# Altium PCB PCB1.PcbDoc (part 1 of 2)
Units mil, origin at the board's own origin, x right, y up, seen from the top; angles counter-clockwise.
Board outline 2930 x 2020 mil, 2 copper layers (Top Layer, Bottom Layer); 49 components, 42 nets, 248 pads, 108 vias.
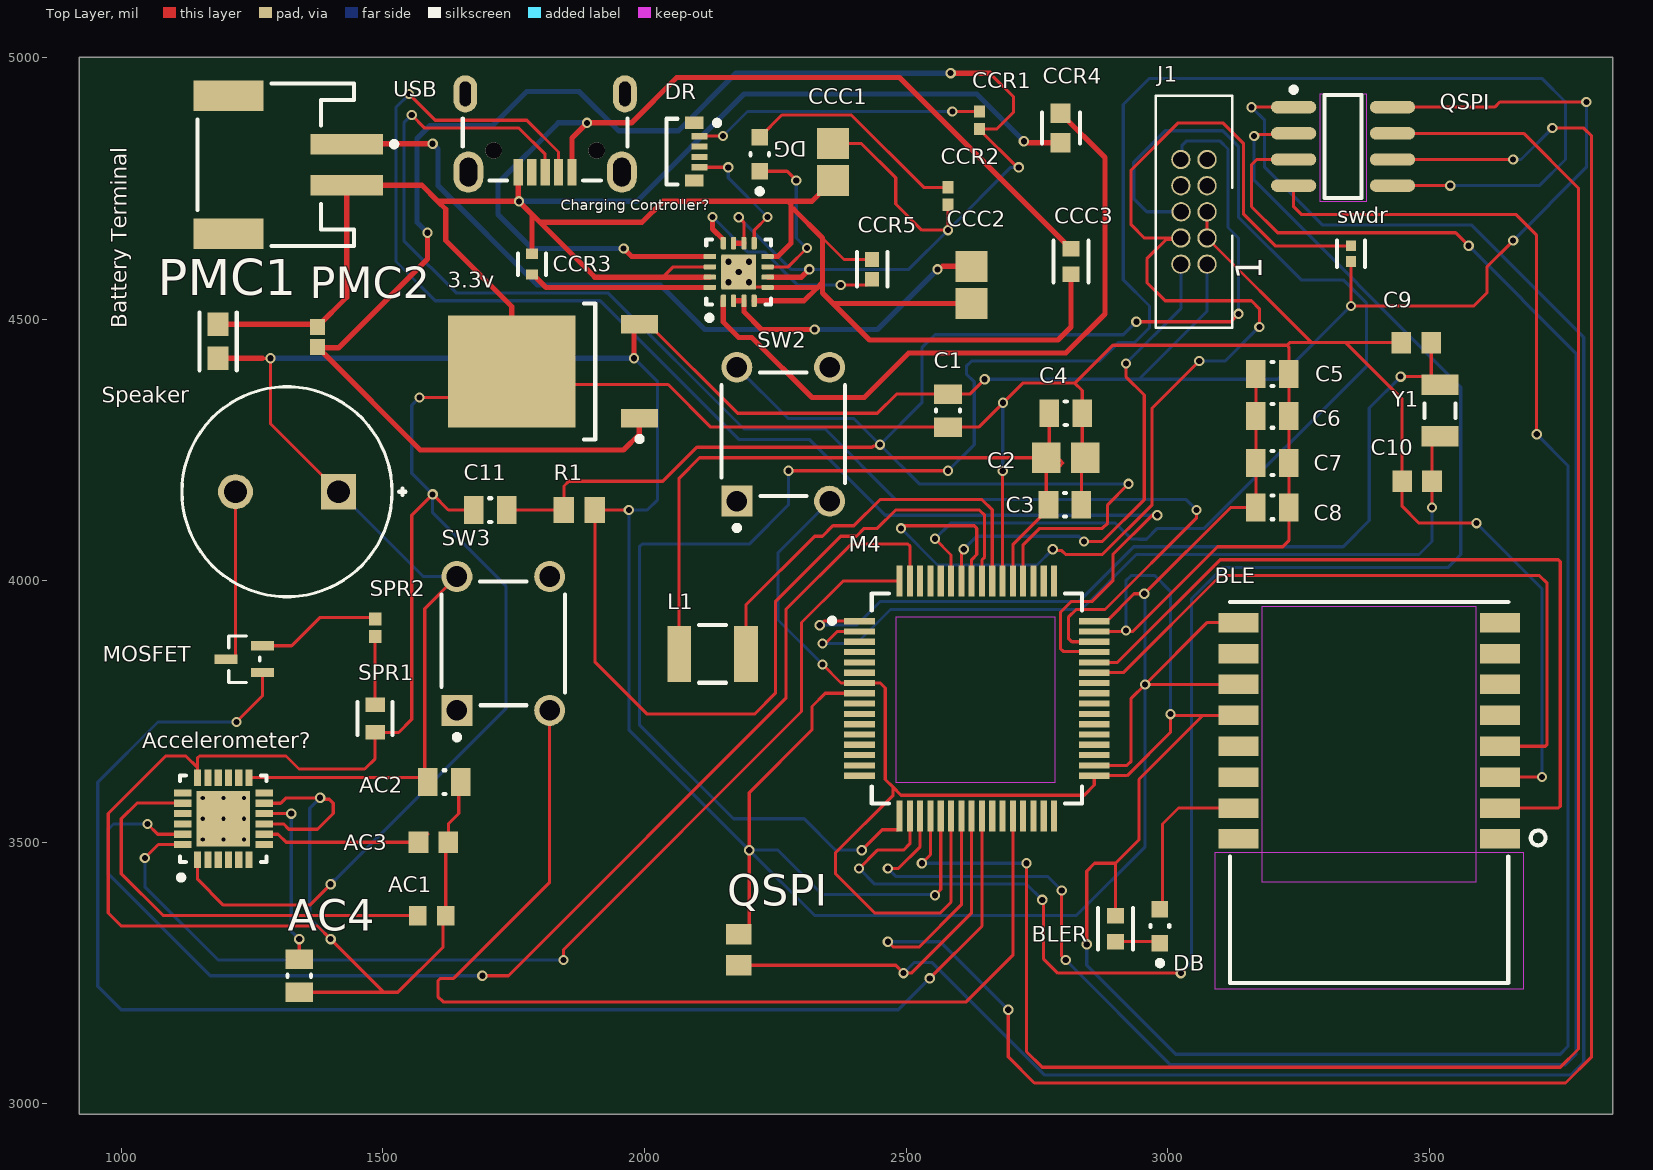
[diagram p0: Top Layer view]
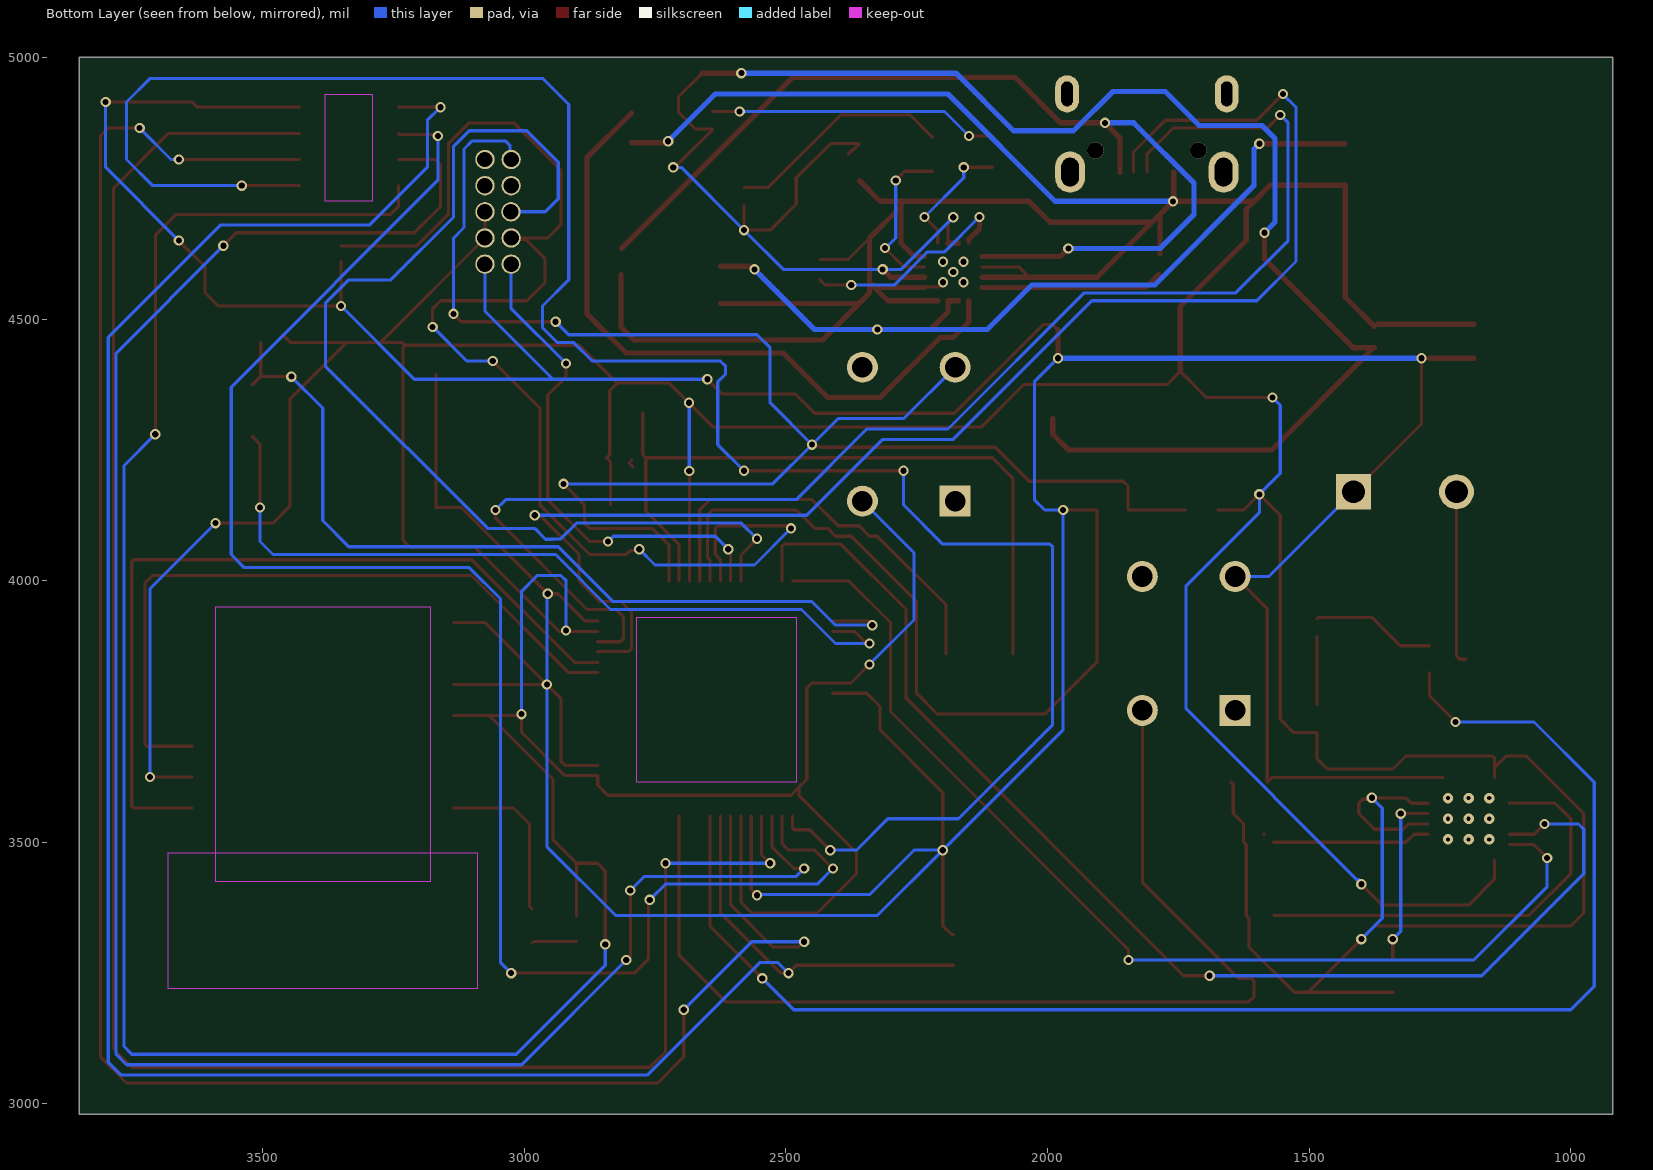
[diagram p1: Bottom Layer view, seen from below]

## Layer stack, top to bottom
Top Solder: solder mask 0.4, Solder Resist, Dk 3.5
Top Layer: signal copper 1.4
Dielectric 1: dielectric 12.6, FR-4, Dk 4.8
Bottom Layer: signal copper 1.4
Bottom Solder: solder mask 0.4, Solder Resist, Dk 3.5

## Board outline
920,5000 920,2980 3850,2980 3850,5000

## Design rules (kind name [scope] priority, off if disabled: settings)
Clearance [All] p1: gap=6 ignorepadtopadclearanceinfootprint=FALSE except(0: Arc-Hole Track-Hole SMDPad-Hole THPad-Hole Via-Hole Fill-Hole Poly-Hole Region-Hole Text-Hole)
PolygonConnect [All] p1: connectstyle=Relief reliefconductorwidth=10 reliefentries=4 polygonreliefangle="90 Angle" airgapwidth=10
RoutingVias [All] p1: holewidth=10 width=20 viastyle="Through Hole" minholewidth=10 minwidth=20 maxholewidth=10 maxwidth=20
SolderMaskExpansion [All] p1: expansion=4 istentingtop=FALSE
Width [All] p1: maxlimit=10 minlimit=6 preferedwidth=6 minimp=50.000000 maximp=50.000000 favimp=50.000000
30 further rules are at their usual default settings.

## Classes and differential pairs
component class U_SWD: J1 swdr
component class U_SPEAKER: MOSFET Speaker SPR1 SPR2
component class U_SOC: C1 C2 C3 C4 C5 C6 C7 C8 C9 C10 C11 L1 M4 R1 SW2 SW3 Y1
component class "U_Power management": 3.3v "Battery Terminal" PMC1 PMC2 USB
component class U_FLASH_BLE: BLE BLER DB QSPI
component class U_Charging: CCC1 CCC2 CCC3 CCR1 CCR2 CCR3 CCR4 CCR5 "Charging Controller?" DG DR
component class U_ACCELEROMETER: AC1 AC2 AC3 AC4 Accelerometer?

## Components (designator, comment, footprint, x,y, rotation, side; value= is the part's Value field where it differs from the comment)
3.3v "KF33BDT-TR" TO-252_L 1825,4400 r180 top
AC1 "GRM188R71H222KA01D" CAPC1608X90X35NL10T15 1593.43,3360 r0 top
AC2 "" CAPC0805(2012)145_L 1617.4,3615 r180 top value=1uF
AC3 "GRM188R71H103KA01D" CAPC1608X90X35ML10T15 1596.46,3500 r180 top
AC4 "" CAPC0805(2012)145_L 1340,3245 r90 top value=1uF
Accelerometer? "MPU6050" INSE-QFN-24_V 1195,3545 r90 top
"Battery Terminal" "S2B-PH-SM4-TB(LF)(SN)" "JST- S2B-PH-SM4-TB(LF)(SN)-2_V" 1295,4795 r270 top
BLE "317030001" XCVR_317030001 3385,3595 r180 top
BLER "CR0603-FX-2000GLF" FP-CR0603-IPC_C 2900,3335 r90 top
C1 "CAP 1uF 50V 0805(2012)" CAPC0805(2012)145_L 2580,4325 r90 top value=1uF
C2 "GRM21BR61E106KA73L" CAPC2013X135X45ML10T25 2805,4235 r180 top
C3 "" CAPC0805(2012)145_L 2803.5,4145 r180 top value=1uF
C4 "CAP 1uF 50V 0805(2012)" CAPC0805(2012)145_L 2805,4320 r180 top value=1uF
C5 "" CAPC0805(2012)145_L 3200,4395 r180 top value=1uF
C6 "" CAPC0805(2012)145_L 3200,4315 r180 top value=1uF
C7 "" CAPC0805(2012)145_L 3200,4225 r180 top value=1uF
C8 "CAP 1uF 50V 0805(2012)" CAPC0805(2012)145_L 3200,4140 r180 top value=1uF
C9 "GRM1885C1H220JA01D" CAPC1608X90X35ML10T15 3475,4455 r0 top
C10 "GRM1885C1H220JA01D" CAPC1608X90X35ML10T15 3476.46,4190 r0 top
C11 "CAP 1uF 50V 0805(2012)" CAPC0805(2012)145_L 1705,4135 r0 top value=1uF
CCC1 "C0805C475K8PACTU" CAPC2013X145X50ML20T25 2360,4800 r90 top
CCC2 "C0805C475K8PACTU" CAPC2013X145X50ML20T25 2625,4565.43 r90 top
CCC3 "CL10A105KP8NNNC" FP-CL10-IPC_C 2815,4610 r270 top
CCR1 "ERJ-U02F1501X" RESC1005X40X25NL05T10 2640,4880 r270 top
CCR2 "ERJ-U02F1501X" RESC1005X40X25NL05T10 2580,4735 r270 top
CCR3 "RN73C1E1K13BTG" FP-RN731E-MFG 1785,4605 r270 top value=1.13KΩ
CCR4 "CRCW060310K0JNEB" FP-CRCW0603-e3-IPC_B 2795,4865 r90 top
CCR5 "RC1005F1181CS" FP-RC1005-IPC_A 2435,4595 r270 top
"Charging Controller?" "BQ24075RGTT" RGT0016C_V 2180,4590 r90 top
DB "APT1608QBC/D" FP-APT1608QBC-D-MFG 2985,3340 r90 top
DG "APT1608ZGCK" FP-APT1608ZGCK-MFG 2220,4815 r90 top
DR "APFA3011-AK13/F" FP-APFA3011-AK13-F-MFG 2075.47,4819.84 r90 top
J1 "SWD" 2X10_BOXHEADER 3050,4705 r90 top
L1 "B82422A1103K100" TDK-B82422A1103K100_V 2130,3860 r0 top
M4 "ATSAMD51J19" FP-C04-085-MFG 2635,3775 r0 top (schematic designator U?)
MOSFET "SSM3K09FU" USM_TOS 1234.94,3850 r90 top
PMC1 "CL10B225KP8NFNC" FP-CL10-IPC_A 1185,4457.56 r90 top
PMC2 "0402ZD104KAT4A" CAPC1005X56X25ML10T15 1375,4465.71 r270 top
QSPI "ERA-6AEB103V" RESC2013X60X40LL20T25_A 2180,3294.53 r270 top (schematic designator BLER2)
QSPI "GD25Q16" MICT-MN-8_N 3335,4830 r0 top
R1 "ERA-6AEB103V" RESC2013X60X40LL20T25_A 1875.47,4135 r180 top
Speaker "AI-1027-TWT-3V-R" FP-MA300D1-1-MFG 1316.57,4170 r180 top
SPR1 "MCT0603MD1000DP500" FP-MCT0603-MFG 1485,3736.57 r90 top
SPR2 "CRG0402F20R" RESC1005X40X25NL10T10 1485,3910 r90 top
SW2 "PTS645SM43SMTR92LFS" ITT-PTS645S-4_V 2265,4280 r90 top
SW3 "PTS645SM43SMTR92LFS" ITT-PTS645S-4_V 1730,3880 r90 top
swdr "CR0402-FX-102GLF" FP-CR0402-IPC_C 3350,4624.9 r270 top
USB "629105150521" 629105150521 1810,4895 r180 top
Y1 "ABS07-120-32.768KHZ-T" ABRA-ABS07_A_V 3520,4325 r90 top

## Footprints (in the part's own frame and the unit in brackets; to place one, negate y for a bottom-side part, rotate by r counter-clockwise, add the part's x,y. Pads: shape width x height; smd on the part's side, far side on the other; paste and mask are expansions set on the pad)
2X10_BOXHEADER [mil]
  round 37 hole 29.53: 1(-100,-25) 2(-100,25) 3(-50,-25) 4(-50,25) 5(0,-25) 6(0,24.61) 7(50,-25) 8(50,25) 9(100,-25) 10(100,25)
  silkscreen extent -221,-73 221,73
629105150521 [mm] "Micro USB 2.0 SMT Type B Horizontal 5 Contacts High Current"
  rect 0.45x1.3 smd: 1(-1.3,2.9) 2(-0.65,2.9) 3(0,2.9) 4(0.65,2.9) 5(1.3,2.9)
  round 0.8 hole 0.8 unplated: MH1(-2.5,1.85) MH2(2.5,1.85)
  oval 1.15x1.8 hole 0.55 slot 1.2 at 90 deg: Shell(-3.875,-0.9) Shell(3.875,-0.9)
  oval 1.45x2 hole 0.85 slot 1.4 at 90 deg: Shell(-3.725,2.9) Shell(3.725,2.9)
  silkscreen extent -4,0.3 4,3.3, body extent -4,-3.3 4,3.3, height 2.75
ABRA-ABS07_A_V [mm] "SMD, 2-Leads, Body 3.2x1.5mm"
  rect 1x1.8 smd: 1(-1.25,0) 2(1.25,0)
  silkscreen extent -0.35,-0.75 0.35,0.75, body extent -1.6,-0.75 1.6,0.75, height 0.9
CAPC0805(2012)145_L [mm] "Chip Capacitor, Body 2.0x1.2mm, Height 1.45mm, IPC High Density"
  rect 0.95x1.35 smd: 1(-0.8,0) 2(0.8,0)
  silkscreen extent -0.05,-0.58 0.05,0.58, body extent -1.1,-0.72 1.1,0.72, height 1.45
CAPC1005X56X25ML10T15 [mm] "Chip Capacitor, 2-Leads, Body 1.00x0.50mm, IPC Low Density"
  rect 0.78x0.74 smd: 1(-0.49,0) 2(0.49,0)
  body extent -0.55,-0.3 0.55,0.3, height 0.56
CAPC1608X90X35ML10T15 [mm] "Chip Capacitor, 2-Leads, Body 1.7x0.9mm, IPC Low Density"
  rect 0.95x1.05 smd: 1(-0.725,0) 2(0.725,0)
  body extent -0.85,-0.45 0.85,0.45, height 0.9
CAPC1608X90X35NL10T15 [mm] "Chip Capacitor, 2-Leads, Body 1.7x0.9mm, IPC Medium Density"
  rect 0.85x0.95 smd: 1(-0.675,0) 2(0.675,0)
  body extent -0.85,-0.45 0.85,0.45, height 0.9
CAPC2013X135X45ML10T25 [mm] "Chip Capacitor, 2-Leads, Body 2.00x1.25mm, IPC Low Density"
  rect 1.4x1.5 smd: 1(-0.95,0) 2(0.95,0)
  body extent -1.05,-0.67 1.05,0.67, height 1.35
CAPC2013X145X50ML20T25 [mm] "Chip Capacitor, 2-Leads, Body 2.00x1.25mm, IPC Low Density"
  rect 1.5x1.55 smd: 1(-0.9,0) 2(0.9,0)
  body extent -1.1,-0.72 1.1,0.72, height 1.45
FP-APFA3011-AK13-F-MFG [mm]
  rect 0.6x0.9 smd paste+0 mask+0: 1(1.4,-0.5) 6(-1.4,-0.5)
  rect 0.3x0.8 smd paste+0 mask+0: 2(0.75,-0.75) 3(0.25,-0.75) 4(-0.25,-0.75) 5(-0.75,-0.75)
  silkscreen extent -1.6,-1.73 1.6,0.85, body extent -1.8,-1.25 1.8,0.95, height 0.25
FP-APT1608QBC-D-MFG [mm]
  rect 0.8x0.8 smd paste+0 mask+0: 1(-0.825,0) 2(0.825,0)
  silkscreen extent -1.92,-0.45 0.05,0.45, body extent -1.33,-0.55 1.33,0.55, height 0.25
FP-APT1608ZGCK-MFG [mm]
  rect 0.8x0.8 smd paste+0 mask+0: 1(-0.825,0) 2(0.825,0)
  silkscreen extent -1.92,-0.45 0.05,0.45, body extent -1.33,-0.55 1.33,0.55, height 0.25
FP-C04-085-MFG [mm]
  rect 1.5x0.3 smd paste+0 mask+0: 1(-5.7,3.75) 2(-5.7,3.25) 3(-5.7,2.75) 4(-5.7,2.25) 5(-5.7,1.75) 6(-5.7,1.25) 7(-5.7,0.75) 8(-5.7,0.25) 9(-5.7,-0.25) 10(-5.7,-0.75) 11(-5.7,-1.25) 12(-5.7,-1.75) 13(-5.7,-2.25) 14(-5.7,-2.75) 15(-5.7,-3.25) 16(-5.7,-3.75) 33(5.7,-3.75) 34(5.7,-3.25) 35(5.7,-2.75) 36(5.7,-2.25) 37(5.7,-1.75) 38(5.7,-1.25) 39(5.7,-0.75) 40(5.7,-0.25) 41(5.7,0.25) 42(5.7,0.75) 43(5.7,1.25) 44(5.7,1.75) 45(5.7,2.25) 46(5.7,2.75) 47(5.7,3.25) 48(5.7,3.75)
  rect 0.3x1.5 smd paste+0 mask+0: 17(-3.75,-5.7) 18(-3.25,-5.7) 19(-2.75,-5.7) 20(-2.25,-5.7) 21(-1.75,-5.7) 22(-1.25,-5.7) 23(-0.75,-5.7) 24(-0.25,-5.7) 25(0.25,-5.7) 26(0.75,-5.7) 27(1.25,-5.7) 28(1.75,-5.7) 29(2.25,-5.7) 30(2.75,-5.7) 31(3.25,-5.7) 32(3.75,-5.7) 49(3.75,5.7) 50(3.25,5.7) 51(2.75,5.7) 52(2.25,5.7) 53(1.75,5.7) 54(1.25,5.7) 55(0.75,5.7) 56(0.25,5.7) 57(-0.25,5.7) 58(-0.75,5.7) 59(-1.25,5.7) 60(-1.75,5.7) 61(-2.25,5.7) 62(-2.75,5.7) 63(-3.25,5.7) 64(-3.75,5.7)
  silkscreen extent -7.15,-5.1 5.1,5.1, body extent -6.55,-6.55 6.55,6.55, height 0.25
FP-CL10-IPC_A [mil]
  rect 45.6x39.85 smd paste+0 mask+0: 1(-32.56,0) 2(32.56,0)
  silkscreen extent -55,-36 55,36, body extent -75,-40 75,40, height 10
FP-CL10-IPC_C [mil]
  rect 29.85x31.97 smd paste+0 mask+0: 1(-24.68,0) 2(24.68,0)
  silkscreen extent -40,-33 40,33, body extent -44,-22 44,22, height 10
FP-CR0402-IPC_C [mil]
  rect 20.29x18.6 smd paste+0 mask+0: 1(-14.9,0) 2(14.9,0)
  silkscreen extent -25,-27 25,27, body extent -29,-15 29,15, height 10
FP-CR0603-IPC_C [mil]
  rect 29.85x31.97 smd paste+0 mask+0: 1(-24.68,0) 2(24.69,0)
  silkscreen extent -40,-33 40,33, body extent -44,-22 44,22, height 10
FP-CRCW0603-e3-IPC_B [mil]
  rect 36.81x37.88 smd paste+0 mask+0: 1(-28.17,0) 2(28.17,0)
  silkscreen extent -30,-37 30,35, body extent -56,-29 56,29, height 10
FP-MA300D1-1-MFG [mm]
  rect 1.7x1.7 hole 1.1 paste-1000 mask+0: 1(-2.5,0)
  round 1.7 hole 1.1 paste-1000 mask+0: 2(2.5,0)
  silkscreen extent -5.75,-5.1 5.1,5.1, body extent -5.2,-5.2 5.2,5.2, height 0.25
FP-MCT0603-MFG [mm]
  rect 0.7x0.95 smd paste+0 mask+0: 1(-0.675,0) 2(0.675,0)
  silkscreen extent -0.8,-0.85 0.8,0.85, body extent -1.12,-0.58 1.12,0.58, height 0.25
FP-RC1005-IPC_A [mil]
  rect 28.16x26.48 smd paste+0 mask+0: 1(-18.84,0) 2(18.84,0)
  silkscreen extent -33,-29 33,29, body extent -41,-21 41,21, height 10
FP-RN731E-MFG [mm]
  rect 0.5x0.6 smd paste+0 mask+0: 1(-0.5,0) 2(0.5,0)
  silkscreen extent -0.53,-0.67 0.53,0.67, body extent -0.85,-0.4 0.85,0.4, height 0.25
INSE-QFN-24_V [mm] "QFN, 24-Leads, Body 4.00x4.00mm, Pitch 0.50mm, Thermal Pad 2.7x2.6mm"
  rect 0.8x0.35 smd: 1(-2,1.25) 2(-2,0.75) 3(-2,0.25) 4(-2,-0.25) 5(-2,-0.75) 6(-2,-1.25) 13(2,-1.25) 14(2,-0.75) 15(2,-0.25) 16(2,0.25) 17(2,0.75) 18(2,1.25)
  rect 0.35x0.85 smd: 7(-1.25,-1.975) 8(-0.75,-1.975) 9(-0.25,-1.975) 10(0.25,-1.975) 11(0.75,-1.975) 12(1.25,-1.975) 19(1.25,1.975) 20(0.75,1.975) 21(0.25,1.975) 22(-0.25,1.975) 23(-0.75,1.975) 24(-1.25,1.975)
  rect 2.7x2.6 smd: 25(0,0)
  silkscreen extent -2.97,-2.1 2.1,2.17, body extent -2,-2 2,2, height 0.95
ITT-PTS645S-4_V [mm] "TH, 4-Leads, Body 6x6mm"
  rect 1.5x1.5 hole 1: 1(-3.25,2.25)
  round 1.5 hole 1: 2(3.25,2.25) 3(-3.25,-2.25) 4(3.25,-2.25)
  silkscreen extent -4.67,-3 3,3, body extent -3,-3 3,3, height 4.4
"JST- S2B-PH-SM4-TB(LF)(SN)-2_V" [mm] "SMD, 2-Leads, Body 7.9x7.6mm, Pitch 2mm"
  rect 1x3.5 smd: 1(-1,3.45) 2(1,3.45)
  rect 1.5x3.4 smd: MP1(-3.35,-2.3) MP2(3.35,-2.3)
  silkscreen extent -3.95,-3.8 3.95,5.88, body extent -3.95,-3.8 3.95,4.8, height 5.6
MICT-MN-8_N [mm] "SOIC, 8-Leads, Body 5x4mm, Pitch 1.27mm, IPC Medium Density"
  oval 2.2x0.6 smd: 1(-2.4,1.905) 2(-2.4,0.635) 3(-2.4,-0.635) 4(-2.4,-1.905) 5(2.4,-1.905) 6(2.4,-0.635) 7(2.4,0.635) 8(2.4,1.905)
  silkscreen extent -2.52,-2.5 0.9,2.88, body extent -2,-2.5 2,2.5, height 0.1
RESC1005X40X25NL05T10 [mm] "Chip Resistor, 2-Leads, Body 1.00x0.50mm, IPC Medium Density"
  rect 0.6x0.55 smd: 1(-0.425,0) 2(0.425,0)
  body extent -0.53,-0.27 0.53,0.28, height 0.4
RESC1005X40X25NL10T10 [mm] "Chip Resistor, 2-Leads, Body 1.00x0.50mm, IPC Medium Density"
  rect 0.65x0.6 smd: 1(-0.425,0) 2(0.425,0)
  body extent -0.55,-0.3 0.55,0.3, height 0.4
RESC2013X60X40LL20T25_A [mm] "Chip Resistor, 2-Leads, Body 2.20x1.35mm, IPC High Density"
  rect 1x1.25 smd: 1(-0.75,0) 2(0.75,0)
  body extent -1.1,-0.67 1.1,0.67, height 0.6
RGT0016C_V [mm] "QFN, 16-Leads, Body 3x3mm, Pitch 0.5mm, Thermal Pad 1.65x1.65mm"
  rrect40% 0.6x0.25 smd: 1(-1.4,0.75) 2(-1.4,0.25) 3(-1.4,-0.25) 4(-1.4,-0.75) 9(1.4,-0.75) 10(1.4,-0.25) 11(1.4,0.25) 12(1.4,0.75)
  rrect40% 0.25x0.6 smd: 5(-0.75,-1.4) 6(-0.25,-1.4) 7(0.25,-1.4) 8(0.75,-1.4) 13(0.75,1.4) 14(0.25,1.4) 15(-0.25,1.4) 16(-0.75,1.4)
  rrect6% 1.7x1.7 smd paste-0.85: 17(0,0)
  rrect6% 1.55x1.55 on Top Paste: 17(0,0)
  silkscreen extent -2.35,-1.58 1.58,1.58, body extent -1.5,-1.5 1.5,1.5, height 1
TDK-B82422A1103K100_V [mm] "Molded Inductor, 2-Leads, Body 3.5x2.8mm"
  rect 1.15x2.7 smd: 1(-1.625,0) 2(1.625,0)
  silkscreen extent -0.65,-1.4 0.65,1.4, body extent -1.97,-1.4 1.97,1.4, height 2.1
TO-252_L [mm] "D-PAK, 4-Leads, Body 6.1x6.5mm, Pitch 2.28mm, Lead Span 9.7mm, IPC High Density"
  rect 1.8x0.9 smd: 1(-4.2,2.28) 3(-4.2,-2.28)
  rect 6.2x5.45 smd: 4(2,0)
  silkscreen extent -4.33,-3.3 -1.5,3.4, body extent -2.05,-3.3 4.15,3.3, height 2.4
USM_TOS [mm]
  rect 0.451x1.136 smd paste+0 mask+0: 1(-0.65,-0.887) 2(0.65,-0.887) 3(0,0.887)
  silkscreen extent -1.13,-0.75 1.13,0.75, body extent 0,0 0.25,0.25, height 0.25
XCVR_317030001 [mm]
  rect 1.95x0.95 smd: 1(-6.35,2.25) 2(-6.35,0.75) 3(-6.35,-0.75) 4(-6.35,-2.25) 5(-6.35,-3.75) 6(-6.35,-5.25) 7(-6.35,-6.75) 8(-6.35,-8.25) 9(6.35,-8.25) 10(6.35,-6.75) 11(6.35,-5.25) 12(6.35,-3.75) 13(6.35,-2.25) 14(6.35,-0.75) 15(6.35,0.75) 16(6.35,2.25)
  silkscreen extent -8.56,-9.25 6.75,9.25

## Part data
3.3v: library part CMP-0244-00072-1, "Very Low Drop Voltage Regulators with Inhibit, 3.3V, 3-Pin DPAK, Tape and Reel", ComponentLink1Description="Manufacturer URL", ComponentLink1URL=http://www.st.com, ComponentLink2Description=Datasheet, ComponentLink2URL=http://www.st.com/internet/com/TECHNICAL_RESOURCES/TECHNICAL_LITERATURE/DATASHEET/CD00000970.pdf, DatasheetVersion=21/02/2008, PackageDescription="3-Pin Transistor Outline Package 2.28 mm Pitch, 9.7 mm Lead Span (DPAK)", PackageReference=TO-252, PackageVersion=2011
AC1: library part CMP-1662-00006-4, "Chip Capacitor, 2.2 nF, +/- 10%, 50 V, -55 to 125 degC, 0603 (1608 Metric), RoHS, Tape and Reel", Manufacturer=Murata, Max Operating Temperature="125 degC", Min Operating Temperature="-55 degC", Package Quantity=4000, Voltage Rating="50 V", ComponentLink1Description="Manufacturer URL", ComponentLink1URL=http://www.murata.com/, ComponentLink2Description=Datasheet, ComponentLink2URL=http://search.murata.co.jp/Ceramy/image/img/A01X/G101/ENG/GRM188R71H222KA01-01.pdf, DatasheetVersion=02/2016, Height="0.8 mm", Lead Pitch="4 mm", Length="1.6 mm", Mount="Surface Mount", Mounting Technology="Surface Mount", PackageDescription="2-Pin Surface Mount Device, Body 1.6 x 0.8 mm", PackageReference=0603, Packaging="Tape and Reel", Pins=2, REACH SVHC="No SVHC", RoHSCompliant=true
AC2 AC4 C1 C3 C4 C5 C6 C7 C8 C11: library part CMP-1036-04761-1, "CAP 1uF 50V ±10% 0805 (2012 Metric) Thickness 1.45mm SMD", Case-EIA=0805, Case-Metric=2012, Rated Voltage="50 V", Tolerance=Â±10%, Max Thickness="1.45 mm", Technology=SMT
AC3: library part CMP-2100-03642-1, "Chip Capacitor, 10 nF, +/- 10%, 50 V, -55 to 125 degC, 0603 (1608 Metric), RoHS, Tape and Reel", Capacitance=10nF, Case Code (Imperial)=0603, Case Code (Metric)=1608, Dielectric=X7R, Dielectric Material=Ceramic, Insulation Resistance=10GR, Manufacturer=Murata, Max Operating Temperature=125degC, Min Operating Temperature=-55degC, Package Description="2-Pin Surface Mount Device, Body 1.6 x 0.8 mm", Package Quantity=1, Tolerance=10%, Voltage=50V, Case/Package=0603, Datasheet URL=http://search.murata.co.jp/Ceramy/image/img/A01X/G101/ENG/GRM188R71H103KA01-01.pdf, Datasheet Version=42401.0, Depth=0.8mm, Height=0.8mm, Lead Free=LeadFree, Length=1.6mm, Manufacturer URL=http://www.murata.com/, Material=Ceramic, Mount=SurfaceMount, Number of Pins=2, Package Reference=0603, Packaging=TapeandReel, REACH SVHC=Unknown, RoHSCompliant=True, Termination=SMD/SMT, Thickness=0.035inch, Voltage Rating=50V, Voltage Rating (DC)=50V, Width=0.031inch
Accelerometer?: library part CMP-1753-00002-1, "3-Axis Gyroscope, 3-Axis Accelerometer / , 2.375 to 3.46 V, -40 to 105 degC, 24-Pin QFN, RoHS, Tape and Reel", Case Code (Imperial)=0603, Case Code (Metric)=1608, Max Operating Temperature=155degC, Min Operating Temperature=-55degC, Package Quantity=5000, Power Rating="100 mW", Resistance="5.6 kohm", Tolerance=1%, Voltage Rating="75 V", Case/Package=0603, ComponentLink1Description="Manufacturer URL", ComponentLink1URL=http://www.invensense.com/, ComponentLink2Description=Datasheet, ComponentLink2URL=https://datasheet.ciiva.com/1513/1788002-1513632.pdf, DatasheetVersion="Rev. 3.4, 08/2013", Height="0.45 mm", Length="1.6 mm", Mount="Surface Mount", PackageDescription="24-Pin Quad Flat No-lead Package, Body 4 x 4 mm, Pitch 0.5 mm", PackageReference=QFN-24, Packaging="Tape and Reel", Pins=2, Radiation Hardening=No, REACH SVHC=Yes, RoHSCompliant=True, Width="0.8 mm"
"Battery Terminal": library part CMP-1755-00001-1, "Male Header, Pitch 2 mm, 1 x 2 Position, Height 5.5 mm, -25 to 85 degC, RoHS, Tape and Reel", Colour=Black, Current Rating="3 A", Max Operating Temperature=105degC, Min Operating Temperature=-65degC, Package Quantity=100, ComponentLink1Description="Manufacturer URL", ComponentLink1URL=http://www.jst.com/home2.html, ComponentLink2Description=Datasheet, ComponentLink2URL=http://www.jst-mfg.com/product/pdf/eng/ePH.pdf, Contact Finish=Lead, Contact Material=Bronze, Contact Plating=Tin, DatasheetVersion=Dec-12, Height="8.13 mm", Lead Pitch="0.1 inch", Length="101.19 mm", Mount="Through Hole", PackageDescription="Male Header, Pitch 2 mm, 1 x 2 Position, Height 5.5 mm", PackageReference=S2B-PH-SM4-TB(LF)(SN)-2, Packaging=Bulk, Pins=40, Radiation Hardening=No, RoHSCompliant=True, Width="2.34 mm"
BLE: "Bluetooth Bluetooth v4.0 Transceiver Module 2.4GHz Integrated, Trace Surface Mount", Package="Module Seeed Technology", Digi-Key_Part_Number=1597-1359-ND, Digi-Key_Purchase_URL=https://www.digikey.kr/product-detail/en/seeed-technology-co-ltd/317030001/1597-1359-ND/5487659?utm_source=snapeda&utm_medium=aggregator&utm_campaign=symbol, MF="Seeed Technology", MP=317030001, SnapEDA_Link=https://www.snapeda.com/parts/317030001/Seeed%20Technology%20Co.%2C%20Ltd/view-part/449174/?ref=snap
BLER: library part CMP-07231-003229-1, "Thick Film Chip Resistors 0603 200Ω 0.1W 1% 100ppm/°C", Case Code (Imperial)=0603, Case Code (Metric)=1608, Max Operating Temperature=155°C, Max Power Dissipation=100mW, Min Operating Temperature=-55°C, Package Quantity=10000, Resistance=200R, Temperature Coefficient=100ppm/°C, Tolerance=1%, Voltage Rating=50V, Case/Package=0603, Composition="Thick Film", Contact Plating=Tin, Depth=0.8mm, Features="Moisture Resistant", Height=0.022inch, Length=1.6mm, Military Standard=Not, Mount="Surface Mount", Number of Terminations=2, Packaging="Tape and Reel", Power Rating=100mW, Radiation Hardening=No, Termination=SMD/SMT, Thickness=457um, Width=0.8mm
C2: library part CMP-2007-03541-1, Manufacturer=Murata, Part Number=GRM21BR61E106KA73L
C9 C10: library part CMP-2000-04945-1, "Chip Capacitor, 22 pF, +/- 5%, 50 V, -55 to 125 degC, 0603 (1608 Metric), RoHS, Tape and Reel", Capacitance=22pF, Case Size/Dimension=0603, Dielectric=C0G, Manufacturer=Murata, Package Description="2-Pin Surface Mount Device, Body 1.6 x 0.8 mm", Package Reference=603, Rated Voltage=50V, Tolerance (%)=±5%, Datasheet URL=https://datasheet.ciiva.com/11786/0900766b807a1cab-11786398.pdf, Datasheet Version=Jul-06, Manufacturer URL=http://www.murata.com/
CCC1 CCC2: library part CMP-2007-01007-1, Manufacturer=Kemet, Part Number=C0805C475K8PACTU
CCC3: library part CMP-13271-003399-1, "Cap Ceramic 1uF 10V X5R ±10% Pad SMD 0603 +85°C T/R", Capacitance=1uF, Case Code (Imperial)=0603, Case Code (Metric)=1608, Dielectric=X5R, Max Operating Temperature=85°C, Min Operating Temperature=-55°C, Package Quantity=1, Tolerance=10%, Voltage=10V, Case/Package=0603, Contact Plating=Tin, Depth=0.8mm, Height=0.8mm, Length=1.6mm, Mount="Surface Mount", Packaging="Tape and Reel", Radiation Hardening=No, Thickness=0.035inch, Voltage Rating=10V, Width=0.031inch
CCR1 CCR2: library part CMP-2002-06462-1, Manufacturer=Panasonic, Part Number=ERJ-U02F1501X
CCR3: library part CMP-03211-004648-1, "Res Thin Film 0402 1.13KΩ 0.1% 1/16W 10ppm/°C Molded SMD", Manufacturer="TE Connectivity", Package=RN731E, Power Rating=0.063W, Resistance=1.13KΩ, Temperature="-55°C to +155°C", Temperature Coefficient=10ppm/°C, Temperature Range High=+155°C, Temperature Range Low=-55°C, Tolerance=0.1%, Voltage Rating=25V, Automotive=No, Category=Res, ComponentLink2Description=Datasheet, ComponentLink2URL=https://www.te.com/commerce/DocumentDelivery/DDEController?Action=showdoc&DocId=Data+Sheet%7F1773270%7FP%7Fpdf%7FEnglish%7FENG_DS_1773270_P.pdf%7F1-1879132-6, Composition="Thin Film", Device Class L1="Passive Components", Device Class L2=Resistors, Device Class L3="Chip SMD Resistors", Height=0.35mm, Ipc Land Pattern Name=RESC10050X30, Lead Free=Yes, Manufacturer Part Number=RN73C1E1K13BTG, Octopart=https://octopart.com/rn73c1e1k13btg-te+connectivity-42626925, octopart_url=https://octopart.com/rn73c1e1k13btg-te+connectivity-42626925, Packaging="250 cut tape length", RoHS=TRUE, Series=RN73
CCR4: library part CMP-2000-03839-2, "RES Thick Film, 10kΩ, 5%, 0.1W, 200ppm/°C, 0603", Case Code (Imperial)=0603, Case Code (Metric)=1608, Max Operating Temperature=155°C, Max Power Dissipation=100mW, Min Operating Temperature=-55°C, Package Quantity=10000, Resistance=10kR, Temperature Coefficient=200ppm/°C, Tolerance=5%, Voltage Rating=75V, Case/Package=0603, Composition="Thick Film", Contact Plating=Tin, Depth=0.85mm, Features="Automotive AEC-Q200", Height=0.02inch, Lead Free="Lead Free", Length=1.55mm, Military Standard=Not, Number of Terminations=2, Packaging="Tape and Reel", Power Rating=100mW, Radiation Hardening=No, Termination=SMD/SMT, Voltage Rating (DC)=75V, Weight=7.1E-05oz, Width=0.85mm
CCR5: library part CMP-13261-002895-1, "Res Thick Film 0402 1.18kΩ 1% 0.063W ±100ppm/°C Molded SMD T/R", Case Code (Imperial)=0402, Case Code (Metric)=1005, Max Operating Temperature=155°C, Max Power Dissipation=63mW, Min Operating Temperature=-55°C, Package Quantity=1, Resistance=1.18kR, Temperature Coefficient=100ppm/°C, Tolerance=1%, Voltage Rating (DC)=50V, Case/Package=0402, Composition="Thick Film", Depth=0.5mm, Features="Moisture Resistant", Height=0.016inch, Lead Free="Lead Free", Length=1mm, Military Standard=Not, Number of Terminations=2, Packaging="Tape and Reel", Power Rating=63mW, Width=0.02inch
"Charging Controller?": library part CMP-0321-00236-2, "USB-Friendly Li-Ion Battery Charger and Power-Path Management IC, Vout 5.5 V, 4.3 V, -40 to 85 degC, 16-pin QFN (RGT), Green (RoHS & no Sb/Br)", Manufacturer="Texas Instruments", Over Voltage Protection=N, Code_JEDEC=MO-220, ComponentLink1Description=Datasheet, ComponentLink1URL=http://www.ti.com/general/docs/lit/getliterature.tsp?genericPartNumber=BQ24075&fileType=pdf, DatasheetVersion=SLUS810G, Eco-Plan="Green (RoHS & no Sb/Br)", Lead Acid=N, Li-Ion=N, Li-Polymer=N, Mounting Technology="Surface Mount", NiCd=N, NiMH=N, PackageDescription="16-Pin Plastic Quad Flat No-Lead, 3 x 3 mm Body, 0.5 mm Pitch, 1.7 x 1.7 mm Exposed Pad", PackageReference=RGT0016C, PackageVersion="revH, Oct-2011", PartNumber=BQ24075RGTT, SubFamily="Battery Charge Management", Vin(Min)(V)=4.3
DB: library part CMP-2000-05788-2, "LED BLUE CLEAR CHIP SMD", Case Code (Imperial)=0603, Case Code (Metric)=1608, Color=Blue, Forward Current=20mA, Forward Voltage=3.3V, Lens Color=Colorless, Max Operating Temperature=85°C, Min Operating Temperature=-40°C, Package Quantity=2000, Case/Package=0603, Dominant Wavelength=465nm, Height=0.75mm, Illumination Color=Blue, Lead Free="Lead Free", Length=1.6mm, Lens Style=Flat, Lens Transparency=Clear, Luminous Intensity=100mcd, Mount="Surface Mount", Number of LEDs=1, Number of Pins=2, Packaging="Tape and Reel", Test Current=20mA, Viewing Angle=120°, Width=0.8mm
DG: library part CMP-44529-000024-1, "LED GREEN CLEAR CHIP SMD", Case Code (Imperial)=0603, Case Code (Metric)=1608, Color=Green, Forward Current=20mA, Forward Voltage=3.3V, Lens Color=Colorless, Max Operating Temperature=85°C, Min Operating Temperature=-40°C, Package Quantity=1, Case/Package=0603, Dominant Wavelength=525nm, Height=0.75mm, Illumination Color=Green, Lead Free="Lead Free", Length=1.6mm, Lens Transparency=Clear, Luminous Intensity=350mcd, Mount="Surface Mount", Packaging="Tape and Reel", Test Current=20mA, Viewing Angle=120°, Width=0.8mm
DR: library part CMP-44529-000011-1, "LED RGB CLEAR 4SMD R/A", Colour="Blue, Green, Red", Forward Current=20mA, Forward Voltage=3.3/3.2/2.2V, Manufacturer=Kingbright, Max Junction Temp=+115°C, Package=0, Power Dissipation=120/120/84mW, Reverse Voltage=5V, Temperature="-40°C to +85°C", Temperature Range High=+85°C, Temperature Range Low=-40°C, Automotive=No, Category=Diode, ComponentLink2Description=Datasheet, ComponentLink2URL=https://www.kingbrightusa.com/images/catalog/SPEC/APFA3011-AK13-F.pdf, Device Class L1=Optoelectronics, Device Class L2=LEDs, Device Class L3=unset, Digikey Description="LED RGB CLEAR 4SMD R/A", Height=1.2mm, Lead Free=Yes, Led Orientation="Side View", Luminous Intensity=150/780/410mcd, Manufacturer Part Number=APFA3011-AK13/F, Mouser Description="Led Rgb Clear 4SMD R/a", Octopart=https://octopart.com/apfa3011-ak13%2Ff-kingbright-85376835, Peak Emmision Wavelength=465/520/640nm, RoHS=TRUE, Viewing Angle=150°, Wavelength=470/525/625nm
J1: "SWD WRITEON W/DISP .75X1.4 LAB", Package=None, Availability=Unavailable, MF=3M, MP=SWD, Price=None, SnapEDA_Link=https://www.snapeda.com/parts/SWD/3M%20%28TC%29/view-part/172681/?ref=snap
L1: library part CMP-2000-05912-1, "Wirewound Inductor, 10 uF, +/- 10%, 180 mA, -55 to 125 degC, 2-Pin SMD, RoHS, Tape and Reel", Current - Saturation=-, Current Rating=180mA, DC Resistance (DCR)=1.6OhmMax, Frequency - Self Resonant=25MHz, Frequency - Test=1MHz, Inductance=10µH, Manufacturer=EPCOS-(TDK), Package / Case=1210(3225Metric), Package Description="2-Pin Surface Mount Device, Body 3.2 x 2.5 mm", Q @ Freq=27@2.52MHz, Ratings=AEC-Q200, Tolerance=±10%, Category=Inductors,Coils,Chokes, Datasheet URL=https://en.tdk.eu/inf/30/db/ind_2008/b82422a_100.pdf, Datasheet Version=10/2012, Family=FixedInductors, Height - Seated (Max)="0.083\"(2.10mm)", Manufacturer URL=http://www.tdk.com/, Material - Core=Ferrite, Mounting Technology=SurfaceMount, Mounting Type=SurfaceMount, Operating Temperature=-, Package Reference=B82422A1103K100, Packaging=CutTape(CT), Series=SIMID, Shielding=Unshielded, Size / Dimension="0.126\"Lx0.098\"W(3.20mmx2.50mm)", Type=Wirewound
M4: library part CMP-06276-000034-1, "IC MCU 32BIT 1MB FLASH 64TQFP", Ambient Temperature Range High=+85°C, Ambient Temperature Range Low=-40°C, Frequency=120MHz, Manufacturer=Microchip, Manufacturer Part Number=ATSAMD51J20A-AU, Max Junction Temp=+105°C, Max Supply Voltage=3.63V, Min Supply Voltage=1.71V, Nominal Supply Current=7mA, Package=C04-085, Temperature="-40°C to +85°C", Automotive=Yes, Automotive Grade="Grade 1", Category=IC, ComponentLink2Description=Datasheet, ComponentLink2URL=http://ww1.microchip.com/downloads/en/DeviceDoc/60001507E.pdf, Core Architecture="ARM Cortex-M4F", Data Bus Width=32bits, Device Class L1="Integrated Circuits (ICs)", Device Class L2="Embedded Processors and Controllers", Device Class L3=Microcontrollers, Digikey Description="IC MCU 32BIT 1MB FLASH 64TQFP", Height=1.2mm, Interface=I2C,SPI,USART,USB,LIN,Ethernet,I2S,RS-485,Other, Lead Free=Yes, Memory Size=1MBytes, Memory Type=FLASH, Mouser Description="MCU 32-bit ARM Cortex M4F RISC 1MB Flash 3.3V 64-Pin TQFP Tray", Number Of A/D Converters=2, Number Of Adc Channels=24, Number Of Cores=1, Number Of Ethernet Channels=1, Number Of I2C Channels=6, Number Of I/Os=51, Number Of Pwm Channels=2, Number Of Spi Channels=6, Number Of Timers/Counters=8, Number Of Usb Channels=1, Octopart=https://octopart.com/atsamd51j20a-au-microchip-83497274, Ram Size=256KBytes, RoHS=TRUE, Standoff Height=0.05mm, Temperature Range High=+85°C, Temperature Range Low=-40°C
MOSFET: "No Description Available", Copyright="Copyright (C) 2018 Accelerated Designs. All rights reserved", Manufacturer_Part_Number=SSM3K09FU, RefDes=RefDes, SourceLibrary=Toshiba_2018-12-14, Type=DEV, Vendor=Toshiba
PMC1: library part CMP-13271-000561-1, "Cap Ceramic 2.2uF 10V X7R ±10% Pad SMD 0603 +125°C T/R", Capacitance=2.2uF, Case Code (Imperial)=0603, Case Code (Metric)=1608, Dielectric=X7R, Max Operating Temperature=125°C, Min Operating Temperature=-55°C, Package Quantity=1, Tolerance=10%, Voltage Rating=10V, Case/Package=0603, Depth=0.8mm, Height=0.8mm, Length=0.063inch, Mount="Surface Mount", Packaging="Tape and Reel", Radiation Hardening=No, Thickness=0.035inch, Width=0.031inch
PMC2: library part CMP-2008-02879-1, Manufacturer="AVX Interconnect / Elco", Part Number=0402ZD104KAT4A
QSPI: library part CMP-2001-00582-2, "Metal Film Chip Resistor, High Reliability Type, 0.125 W, +/- 0.1%, -55 to 155 degC, 0805 (2012 Metric), RoHS, Tape and Reel", Case Code - in=0805, Case Code - mm=2012, Manufacturer=Panasonic, Operating Temperature Range=-55Cto+155C, Package / Case=0805(2012metric), Package Description="2-Pin Surface Mount Device, Body 2 x 1.25 mm", Power Rating=125mW(1/8W), Resistance=10kOhms, Temperature Coefficient=25PPM/C, Tolerance=0.1%, Voltage Rating=100V, Brand=Panasonic, Datasheet URL=https://industrial.panasonic.com/cdbs/www-data/pdf/RDM0000/AOA0000C307.pdf, Datasheet Version=02/2016, Factory Pack Quantity=5000, Height=0.5mm, Length=2mm, Manufacturer URL=http://www.panasonic.com/, Mounting Technology=SurfaceMount, Package Reference=0805, Packaging=Reel, Product=ThinFilmResistorsSMD, Product Category=ThinFilmResistors-SMD, RoHS=Details, Series=ERA-6A, Termination Style=SMD/SMT, Type=MetalFilmChipResistors, Width=1.25mm
QSPI: library part CMP-0357-00068-1, "1 Mb (x1) Serial NOR Flash Memory with Page Erase, 75 MHz, 2.7 to 3.6 V, 8-pin SO8 Narrow (MN), Tube", Manufacturer=Micron, Package="SO8 Narrow", PartNumber=M45PE10-VMN6P, Voltage=2.7V-3.6V, Applications=Embedded, ComponentLink1Description="Manufacturer URL", ComponentLink1URL=http://www.micron.com/, ComponentLink2Description=Datasheet, ComponentLink2URL=http://www.micron.com/~/media/Documents/Products/Data%20Sheet/NOR%20Flash/Serial%20NOR/M25PE_M45PE/M45PE10.pdf, ComponentLink3Description="Package Specification", ComponentLink3URL=http://www.micron.com/~/media/Documents/Products/Data%20Sheet/NOR%20Flash/Serial%20NOR/M25P/M25P05A.pdf, DatasheetVersion="Rev. 8", Density=1Mb, Mounting Technology="Surface Mount", PackageDescription="8-Pin SO Narrow, 3.9 X 4.9 mm, Pitch 1.27 mm", PackageReference=MICT-MN-8, PackageVersion="Rev 11", Part Family=M45PE, Part Status=Production, RoHS=Yes, Speed="75 MHz", Type="Page Erase", Width=x1
R1: library part CMP-2000-06228-1, "Metal Film Chip Resistor, High Reliability Type, 0.125 W, +/- 0.1%, -55 to 155 degC, 0805 (2012 Metric), RoHS, Tape and Reel", Case Code - in=0805, Case Code - mm=2012, Manufacturer=Panasonic, Operating Temperature Range=-55Cto+155C, Package / Case=0805(2012metric), Package Description="2-Pin Surface Mount Device, Body 2 x 1.25 mm", Power Rating=125mW(1/8W), Resistance=10kOhms, Temperature Coefficient=25PPM/C, Tolerance=0.1%, Voltage Rating=100V, Brand=Panasonic, Datasheet URL=https://industrial.panasonic.com/cdbs/www-data/pdf/RDM0000/AOA0000C307.pdf, Datasheet Version=02/2016, Factory Pack Quantity=5000, Height=0.5mm, Length=2mm, Manufacturer URL=http://www.panasonic.com/, Mounting Technology=SurfaceMount, Package Reference=0805, Packaging=Reel, Product=ThinFilmResistorsSMD, Product Category=ThinFilmResistors-SMD, RoHS=Details, Series=ERA-6A, Termination Style=SMD/SMT, Type=MetalFilmChipResistors, Width=1.25mm
Speaker: library part CMP-06153-000004-1, "Audio Indicators & Alerts 1300pF 300kHz Ultrasonic Sensor", Capacitance=1.3nF, Frequency=300kHz, Max Operating Temperature=70°C, Min Operating Temperature=-20°C, Package Quantity=50, Voltage Rating=50V, Lead Free="Lead Free", Mount=Flush, Number of Pins=2, Radiation Hardening=No, Termination="Through Hole"
SPR1: library part CMP-02407-007553-1, "RES SMD 100 OHM 1% 1/8W 0603", Case Code (Imperial)=0603, Case Code (Metric)=1608, Max Operating Temperature=175°C, Max Power Dissipation=150mW, Min Operating Temperature=-55°C, Package Quantity=1, Power Rating=125mW, Resistance=100R, Temperature Coefficient=25ppm/°C, Tolerance=0.5%, Voltage Rating=75V, Case/Package=0603, Composition="Thin Film", Features="Automotive AEC-Q200", Height=0.022inch, Length=0.061inch, Number of Terminations=2, Packaging="Tape and Reel", REACH SVHC="No SVHC", Termination=SMD/SMT, Voltage Rating (DC)=75V, Weight=7.1E-05oz, Width=0.8mm
SPR2: library part CMP-2002-05710-1, Manufacturer="TE Connectivity / AMP", Part Number=CRG0402F20R
SW2 SW3: library part CMP-2000-05160-1, "6 mm Tact Switche, SPST, NO, -20 to 60 degC, 4-Pin SMT, RoHS, Tape and Reel", Manufacturer="ITT Cannon", Datasheet URL=https://datasheet.ciiva.com/29903/getdatasheetpartid-786341-29903846.pdf, Datasheet Version=Feb-14, Manufacturer URL=http://www.ittcannon.com/
swdr: library part CMP-2002-04703-2, "Thick Film Chip Resistors 0402 1kΩ 0.0625W 1% 100ppm/°C", Case Code (Imperial)=0402, Case Code (Metric)=1005, Max Operating Temperature=155°C, Max Power Dissipation=63mW, Min Operating Temperature=-55°C, Package Quantity=10000, Power Rating=62.5mW, Resistance=1kR, Temperature Coefficient=100ppm/°C, Tolerance=1%, Voltage Rating=50V, Case/Package=0402, Composition="Thick Film", Contact Plating=Tin, Height=0.016inch, Length=0.039inch, Mount="Surface Mount", Number of Terminations=2, Packaging="Tape and Reel", Radiation Hardening=No, Termination=SMD/SMT, Thickness=356um, Width=0.02inch
USB: library part CMP-1502-03252-1, "Micro USB 2.0 Type B Receptacle WR-COM, Horizontal, SMT, with Pegs, High Current at Pin 1 & Pin 5", Contact Resistance=30mOhm, Manufacturer="Wurth Elektronik", Operating Temperature=-40to85degC, Rated Current=3A, Working Voltage=30VAC, Connector Type=MicroUSB2.0TypeB, Datasheet URL=https://katalog.we-online.de/em/datasheet/629105150521.pdf, Gender=Receptacle, Manufacturer URL=http://www.we-online.de, Mounting Technology=SMT, Orientation=Horizontal, Package Reference=629105150521, Packaging=TapeandReel, Part Number=629105150521, Publisher=WurthElektronik
Y1: library part CMP-2000-07587-1, "Tuning Fork Crystal, 32.768 KHz, +/- 20 ppm, -40 to 85 degC, 2-Pin SMD, RoHS, Tape and Reel", Case\/Package=SMD/SMT, ESR (Equivalent Series Resistance)=55KOhm, Frequency=32.768KHz, Frequency Tolerance=20ppm, Load Capacitance=6pF, Manufacturer=Abracon, Max Operating Temperature=85degC, Min Operating Temperature=-40degC, Package Description="2-Pin Surface Mount Device, Body 3.2 x 1.5 mm", Package Quantity=3000, Package Reference=ABS07, Series Resistance=60KOhm, Datasheet URL=http://www.abracon.com/Resonators/ABS07-120-32.768kHz-T.pdf, Datasheet Version=11/2014, Depth=1.5mm, Height=0.035inch, Lead Free=LeadFree, Length=3.2mm, Manufacturer URL=http://www.abracon.com/, Mount=SurfaceMount, Mounting Technology=SurfaceMount, Number of Pins=2, Packaging=TapeandReel, Radiation Hardening=No, REACH SVHC=NoSVHC, RoHSCompliant=True, Termination=SMD/SMT, Tolerance=20ppm, Width=0.061inch

## Via types
v1: diameter 19.68, hole 11.81, Top Layer to Bottom Layer, 99 vias
v2: diameter 19.68, hole 7.87, Top Layer to Bottom Layer, 9 vias

## Nets (pads, with @x,y where several pads share a name; then routed paths per layer and width w, separated by ;. In a path a pad name is that pad's centre, name@x,y a point inside that pad or via, vN(x,y) a via of type N, cw(c..) or ccw(c..) an arc to the next point about the centre after c; other vN are vias at no path point)
Net3.3v_1: 3.3v.1 "Charging Controller?.6" "Charging Controller?.10" "Charging Controller?.11" CCC1.2 CCR1.2 CCR2.2 PMC2.2 | length 3955.2
  Top Layer w6: PMC2.2@1375,4445.63 1375.63,4445 1386.57,4434.06 PMC2.2@1387.35,4434.06 ; 3.3v.1@1990,4309.88 3.3v.1 ; v1@2180,4695 v1(2180,4694.68) 2189.84,4684.84 2189.84,4645.12 ; CCC1.2@2380.43,4815 CCC1.2 2414.57,4835.43 2480,4770 2480,4720 2530,4670 v1(2580,4670) CCR2.2 ; 2660,4970 2705,4925 2705,4895 2673.27,4863.27 CCR1.2 2640,4862.28 2712.28,4790 v1(2715,4790)
  Top Layer w10: PMC2.2@1375.63,4445 1415,4445 1585,4615 v1(1585,4665) ; PMC2.2@1387.35,4434.06 1571.42,4250 1960,4250 1990,4280 3.3v.1@1990,4309.88 ; 2170.16,4645.12 2189.84,4645.12 ; 2235.12,4580.16 2300.16,4580.16 v1(2315,4595) ; v1(2585,4970) 2660,4970
  Bottom Layer w6: v1(2180,4694.68) 2279.68,4595 v1(2315,4595) 2505,4595 v1(2580,4670) 2700,4790 v1(2715,4790)
  Bottom Layer w10: v1(1585,4665) 1565,4685 1565,4845 1590,4870 1710,4870 1775,4935 1875,4935 1950,4860 2065,4860 2175,4970 v1(2585,4970)
Net3.3v_3: 3.3v.3 AC2.2 Accelerometer?.13 BLE.9 BLE.11 C1.2 C5.2 C6.2 C7.2 C8.2 J1.1 M4.8 M4.21 M4.34 M4.48 M4.56 PMC1.1 QSPI.1@2180,3324.06 QSPI.8 R1.1 Speaker.1 SW3.2 swdr.2 | length 11603.3
  Top Layer w6: Accelerometer?.13 1571.26,3623.74 1580,3615 1580,3946.53 SW3.2 ; 1270,4425 v1(1285,4425) 1285,4300 Speaker.1 ; v1(1970,4135) R1.1 1905,3845 2005,3745 2210,3745 2250,3785 2250,3960 2375,4085 2405,4085 2420,4100 2445,4100 2480,4135 2640,4135 2650,4125 2650,4045 2644.84,4039.84 M4.56 ; 3.3v.3@1980,4479.41 3.3v.3 2008.07,4489.76 2177.83,4320 2445,4320 2481.5,4356.5 C1.2 2621.5,4356.5 v1(2650,4385) ; QSPI.1@2180,3324.06 2183.31,3324.06 2200,3340.74 v1(2200,3485) 2200,3595 2320,3715 2320,3759.68 2345.16,3784.84 M4.8 ; v1(2555,3398.7) 2566.1,3409.81 M4.21 ; M4.34 2922.05,3647.05 2930,3655 2930,3775 v1(2956.69,3801.69) ; M4.48 2883.03,3922.64 2935.39,3975 v1(2955,3975) 3120,4140 C8.2 C7.2 C6.2 C5.2 ; BLE.11 v1(2956.69,3801.69) ; BLE.9 3074.8,3919.8 v1(2956.69,3801.69) ; swdr.2 v1(3350,4525) 3585,4525 3610,4550 3610,4600 v1(3660,4650) ; QSPI.8 3624.72,4905 3634.72,4915 v1(3800,4915)
  Top Layer w10: PMC1.1 1270,4425 ; v1(1980,4425) 3.3v.3@1980,4479.41
  Bottom Layer w6: Speaker.1 1577.05,4007.95 SW3.2 ; v1(1980,4425) 2025,4380 2025,4155 2005,4135 v1(1970,4135) 1970,3715 v1(2200,3485) ; v1(2555,3398.7) 2553.7,3400 2340,3400 2255,3485 v1(2200,3485) ; v1(2650,4385) 2945,4385 ; v1(2955,3975) 2956.69,3973.31 v1(2956.69,3801.69) 2956.69,3491.69 2825,3360 2325,3360 v1(2200,3485) ; J1.1 3075,4515 2945,4385 ; v1(3350,4525) 3210,4385 2945,4385 ; v1(3660,4650) 3800,4790 v1(3800,4915)
  Bottom Layer w10: v1(1285,4425) v1(1980,4425)
Net3.3v_4: 3.3v.4 "Battery Terminal.2" "Charging Controller?.4" "Charging Controller?.5" "Charging Controller?.8" "Charging Controller?.14" "Charging Controller?.15" "Charging Controller?.17"@2180,4590 AC1.2 AC2.1 AC3.1 AC4.1 Accelerometer?.1 Accelerometer?.9 Accelerometer?.11 Accelerometer?.18 BLE.3 BLE.12 BLER.2 C1.1 C2.1 C3.1 C4.1 C5.1 C6.1 C7.1 C8.1 C9.1 C10.1 C11.1 CCC1.1 CCC2.1 CCC3.2 CCR3.1 CCR4.1 CCR5.1 J1.3 J1.5 M4.7 M4.22 M4.33 M4.47 M4.54 PMC1.2 PMC2.1 QSPI.4 SPR1.1 SW2.3 USB.5 | length 21268.7
  Top Layer w6: Accelerometer?.1 1145.79,3429.21 1195,3380 1360,3380 v1(1400,3420) ; Accelerometer?.18 1145.79,3642.61 ; Accelerometer?.9 1309.84,3535.16 1320,3525 1375,3525 1405,3555 1405,3575 1397.62,3582.38 1382.62,3582.38 v1(1380,3585) 1315,3585 1304.53,3574.53 Accelerometer?.11 ; AC4.1 1501.5,3213.5 ; PMC2.1@1369.88,4490.12 PMC2.1 PMC2.1@1375,4485.79 ; v1(1570,4350) 1696.26,4350 3.3v.4 1771.26,4375 2045,4375 2126.5,4293.5 C1.1 2638.5,4293.5 2722.51,4377.51 2822.49,4377.51 ; AC2.1 1645,3611.1 1645,3555 1625,3535 AC3.1 1620,3495 AC1.2 1615,3355 1615,3300 1528.5,3213.5 1501.5,3213.5 ; C11.1 1625,4135 v1(1595,4165) 1555,4125 1555,3735 1530,3710 SPR1.1 1485,3660 1465,3640 1339.65,3640 1314.65,3665 1149.3,3665 1145.79,3661.49 1145.79,3642.61 ; 2035,4580 2054.84,4599.84 2124.88,4599.84 ; 2070,4580 2070.16,4580.16 ; v1(2199.69,4570.32) 2208.99,4561.01 2234.58,4561.01 2235.12,4560.47 ; 2280,4710 2285,4710 ; 2329.53,4560.47 2330,4560 ; v1(2340,3840) 2375.47,3804.53 M4.7 2450.47,3804.53 2460,3795 2460,3620 2475,3605 ; 2340,4655 2381.16,4613.84 CCR5.1 ; CCC1.1@2359.02,4764.57 CCC1.1 ; M4.22 2585.79,3385.79 2565,3365 2440,3365 2365,3440 2365,3480 2475,3590 2475,3605 ; M4.54 2684.21,4209.21 v1(2684.61,4209.61) v1@2685,4210 ; v1(2725,4840) v1@2728.17,4836.83 ; C3.1 2835,4227.6 C2.1 2836.5,4240.91 C4.1 2836.5,4363.5 2822.49,4377.51 ; v1(2845,3305) 2845,3445 2860,3460 2900,3460 ; M4.33@2859.41,3625 2859.41,3609.41 2840,3590 2490,3590 2475,3605 ; M4.47 2932.95,3902.95 3095,4065 3220,4065 3231.5,4076.5 C8.1 C7.1 C6.1 C5.1 3231.5,4446.49 3227.98,4450 ; M4.33@2861.77,3625 M4.33 2922.36,3627.36 3005,3710 v1(3005,3745) 3007.36,3742.64 3067.36,3742.64 ; BLER.2 2900,3460 ; J1.5 J1.3 3275,4455 ; BLE.12 3067.36,3742.64 ; QSPI.4 3240.51,4714.49 3255,4700 3665,4700 3705,4660 v1(3705,4280) ; C9.1@3462.16,4470.7 C9.1 3340,4455 ; v1(3590,4110) 3480,4110 3447.91,4142.09 C10.1 3447.91,4347.09 3340,4455 ; BLE.3 3635.47,3625 v1(3715,3625) ; 1145.79,3642.61 1123.4,3665 1085,3665 975,3555 975,3365 1000,3340 1375,3340 v1(1400,3315) 1501.5,3213.5 ; 2822.49,4377.51 2894.97,4450 3227.98,4450 ; 2900,3460 2945,3505 2945,3620.28 3067.36,3742.64 ; 3227.98,4450 3232.98,4455 3275,4455 ; 3275,4455 3340,4455
  Top Layer w10: PMC1.2 PMC2.1@1369.88,4490.12 ; PMC2.1@1375,4485.79 1430.83,4541.61 1430.83,4755.63 1574.37,4755.63 1605,4725 ; 3.3v.4 1746.26,4523.74 1620,4650 1620,4710 1605,4725 ; USB.5 1758.82,4726.18 v1(1760,4725) ; CCR3.1 1785,4700 ; 2070,4580 2035,4580 1905,4580 1800,4685 ; 2070.16,4580.16 2124.88,4580.16 ; 2209.53,4534.88 2304.88,4534.88 2330,4560 2340,4570 ; 2235.12,4560.47 2329.53,4560.47 ; 2235.12,4619.53 2254.53,4619.53 2280,4645 2280,4710 2280,4720 2275,4725 ; 2285,4710 2340,4655 2340,4570 ; CCC1.1@2359.02,4764.57 2319.45,4725 2275,4725 ; CCC2.1 2360,4530 ; v1@2728.17,4836.83 CCR4.1 ; CCC3.2 2815,4485 2790,4460 2430,4460 2360,4530 ; 1605,4725 v1(1760,4725) ; v1(1760,4725) 1785,4700 ; 1785,4700 1800,4685 ; 1800,4685 1995,4685 2035,4725 2275,4725 ; 2340,4570 2340,4550 2360,4530
  Bottom Layer w6: v1(1380,3585) 1360,3565 1360,3355 v1(1400,3315) ; 1405,3428.7 1400,3423.7 v1(1400,3420) 1735,3755 1735,3990 1595,4130 v1(1595,4165) 1555,4205 1555,4335 v1(1570,4350) ; v1(2340,3840) 2255,3925 2255,4053.47 SW2.3 ; v1(2684.61,4209.61) 2684.61,4339.61 v1(2685,4340) ; v1(2845,3305) 2845,3265 3015,3095 3750,3095 3765,3110 3765,4220 v1(3705,4280) ; v1(2920,3905) 2920,4000 2930,4010 2975,4010 3005,3980 v1(3005,3745) ; v1(3590,4110) 3715,3985 v1(3715,3625)
  Bottom Layer w10: v1(1760,4725) 1985,4725 2190,4930 2635,4930 v1(2725,4840)
  other v1: 2160.32,4570.32 2180,4590 2160.32,4609.69 2199.69,4609.69
NetAC1_1: AC1.1 Accelerometer?.20 | length 834.9
  Top Layer w6: Accelerometer?.20 1116.77,3575 1030,3575 1000,3545 1000,3440 1080,3360 AC1.1
NetAC3_2: AC3.2 Accelerometer?.8 | length 302.2
  Top Layer w6: Accelerometer?.8 1299.53,3515.47 1315,3500 AC3.2 ; AC3.2@1585.99,3515.47 AC3.2@1586.46,3515
NetAC4_2: AC4.2 Accelerometer?.10 | length 336.9
  Top Layer w6: Accelerometer?.10 v1(1324.84,3554.84) v1@1325,3555 ; AC4.2 v1(1340,3315)
  Bottom Layer w6: v1(1324.84,3554.84) 1324.84,3330.16 v1(1340,3315)
NetAccelerometer?_23: Accelerometer?.23 M4.63 | length 2362.1
  Top Layer w6: v1(1050,3535) 1069.53,3515.47 Accelerometer?.23 ; v1(1690,3245) 1740,3245 2270,3775 2270,3945 2395,4070 2503.53,4070 2507.05,4066.49 M4.63
  Bottom Layer w6: v1(1050,3535) 985,3535 975,3525 975,3440 1170,3245 v1(1690,3245)
NetAccelerometer?_24: Accelerometer?.24 M4.64 | length 2049.6
  Top Layer w6: v1(1045,3470) 1070.79,3495.79 Accelerometer?.24 ; v1(1845,3275) 1845,3295 2300,3750 2300,3920 2379.41,3999.41 M4.64
  Bottom Layer w6: v1(1045,3470) 1045,3415 1185,3275 v1(1845,3275)
"NetBattery Terminal_1": "Battery Terminal.1" "Charging Controller?.2" "Charging Controller?.3" CCC2.2 | length 1622.4
  Top Layer w6: 1430.83,4834.37 1431.46,4835 ; v1(2560,4595) 2563.7,4595 2569.57,4600.87
  Top Layer w10: 1431.46,4835 1560,4835 v1(1595,4835) ; 2170.16,4534.88 2189.84,4534.88 2189.84,4513.87 2223.72,4480 v1(2325,4480) ; 2569.57,4600.87 CCC2.2
  Bottom Layer w10: v1(1595,4835) 1605,4825 1605,4755 1795,4565 2030,4565 2115,4480 v1(2325,4480) 2445,4480 v1(2560,4595)
NetBLE_2: BLE.2 M4.44 | length 1557.2
  Top Layer w6: M4.44 2903.9,3843.9 3100,4040 3746.49,4040 3750,4036.49 3750,3568.99 3746.49,3565.47 BLE.2
NetBLE_4: BLE.4 M4.43 | length 1348.1
  Top Layer w6: M4.43 2915,3824.21 3100.79,4010 3710,4010 3725,3995 3725,3687.1 3721.49,3683.58 BLE.4
NetBLE_15: BLE.15 DB.2 | length 322.2
  Top Layer w6: DB.2 2990,3377.48 2990,3535 3020.47,3565.47 BLE.15
NetBLER_1: BLER.1 DB.1 | length 86.2
  Top Layer w6: BLER.1 2982.2,3310.32 DB.1
NetC2_2: C2.2 C3.2 C4.2 L1.1 M4.53 | length 1422
  Top Layer w6: L1.1 2066.02,4196.02 2105,4235 C2.2 ; M4.53 2703.9,4069.02 2767.6,4132.72 C2.2 ; C4.2 2773.5,4240.91 C2.2 ; C2.2@2792.4,4217.6 2799.8,4225 C2.2@2793.9,4230.91
NetC9_2: C9.2 M4.1 Y1.2 | length 1658.3
  Top Layer w6: v1(2335,3915) 2342.64,3922.64 M4.1 ; v1(3445,4390) Y1.2@3504.21,4390 ; C9.2 3503.54,4390.67 Y1.2@3504.21,4390 ; Y1.2 Y1.2@3504.21,4390
  Bottom Layer w6: v1(2335,3915) 2405,3915 2450,3960 2830,3960 2935,4065 3335,4065 3385,4115 3385,4330 v1(3445,4390)
NetC10_2: C10.2 M4.2 Y1.1 | length 1532.9
  Top Layer w6: v1(2340,3880) 2345,3880 2367.95,3902.95 M4.2 ; v1(3505,4140) C10.2 3505,4260.79 Y1.1
  Bottom Layer w6: v1(2340,3880) 2405,3880 2470,3945 2835,3945 2940,4050 3480,4050 3505,4075 v1(3505,4140)
NetC11_2: C11.2 J1.10 M4.52 R1.2 SW2.2 | length 3271.1
  Top Layer w6: C11.2 R1.2 1845.94,4180.94 1855,4190 2035,4190 2100,4255 2435,4255 2437.38,4257.38 2447.38,4257.38 v1(2450,4260) ; M4.52 2723.58,4068.58 2755,4100 2875,4100 2885,4110 2885,4145 v1(2925,4185) ; v1(2940,4495) 3120,4495 v1(3135,4510)
  Bottom Layer w6: SW2.2 2274.37,4310 2400,4310 v1(2450,4260) ; v1(2925,4185) 2525,4185 v1(2450,4260) ; v1(2940,4495) 2915,4470 2555,4470 2530,4445 2530,4340 v1(2450,4260) ; J1.10 3027.5,4807.5 3027.5,4832.5 3035,4840 3100,4840 3115,4825 3115,4675 3135,4655 v1(3135,4510)
NetCCC3_1: "Charging Controller?.13" CCC3.1 USB.1 | length 1918
  Top Layer w6: CCC3.1@2813.94,4634.68 CCC3.1
  Top Layer w10: USB.1 1861.18,4846 1890.18,4875 1975,4875 2061.49,4961.49 2487.14,4961.49 CCC3.1@2813.94,4634.68 ; v1(1960,4635) 1975.47,4619.53 2124.88,4619.53
  Bottom Layer w10: v1(1890,4875) 1835,4875 1720,4760 1720,4700 1785,4635 v1(1960,4635)
NetCCR1_1: CCR1.1 DR.2 | length 559.2
  Top Layer w6: DR.2 2105.32,4849.69 2149.68,4849.69 v1(2150,4850) ; v1@2585,4900 v1(2588.27,4896.73) CCR1.1
  Bottom Layer w6: v1(2150,4850) 2196.73,4896.73 v1(2588.27,4896.73)
NetCCR2_1: CCR2.1 DG.2 | length 434.9
  Top Layer w6: DG.2 2262.52,4890 2395,4890 2533.27,4751.73 CCR2.1
NetCCR3_2: "Charging Controller?.16" CCR3.2 | length 350.2
  Top Layer w6: CCR3.2 CCR3.2@1786.97,4585.31
  Top Layer w10: CCR3.2@1786.97,4585.31 1811.81,4560.47 2124.88,4560.47
NetCCR4_2: "Charging Controller?.1" CCR4.2 | length 1314.7
  Top Layer w6: CCR4.2 CCR4.2@2795.53,4893.17
  Top Layer w10: 2150.47,4534.88 2150.47,4494.53 2180,4465 2205,4465 2320,4350 2326.73,4350 2420,4350 2505,4435 2805,4435 2880,4510 2880,4808.7 CCR4.2@2795.53,4893.17
NetCCR5_2: "Charging Controller?.12" CCR5.2 | length 422.3
  Top Layer w6: 2150.47,4645.12 2150.47,4652.01 ; v1(2375,4565) 2423.84,4565 2423.92,4565.08 2424.76,4565.08 2435,4575.31 CCR5.2
  Top Layer w10: v1(2130,4695) 2130,4672.48 2150.47,4652.01
  Bottom Layer w6: v1(2130,4695) 2196.47,4628.53 2229.18,4628.53 2292.71,4565 v1(2375,4565)
"NetCharging Controller?_7": "Charging Controller?.7" DG.1 | length 306
  Top Layer w6: DG.1 2272.48,4782.52 v1(2290,4765) ; 2235.12,4599.84 2274.44,4599.84 v1(2310.57,4635.97)
  Bottom Layer w6: v1(2290,4765) 2290,4655 v1@2310,4635
"NetCharging Controller?_9": "Charging Controller?.9" DR.5 | length 249.4
  Top Layer w6: DR.5 2105.16,4790.16 2159.84,4790.16 v1(2160,4790) ; 2210,4645.59 2209.53,4645.12 2209.53,4669.53 v1(2235,4695) v1@2240,4700
  Bottom Layer w6: v1(2160,4790) 2160,4770 v1(2235,4695)
NetJ1_2: J1.2 M4.58 | length 963.1
  Top Layer w6: M4.58 2605.47,4055.47 v1(2610,4060) ; v1(2840,4075) 2875,4075 2955,4155 2955,4355 2920,4390 v1(2920,4415)
  Bottom Layer w6: v1(2610,4060) 2635,4085 2830,4085 v1(2840,4075) ; v1(2920,4415) 3025,4520 J1.2
NetJ1_4: J1.4 M4.57 swdr.1 | length 2514.3
  Top Layer w6: v1(2490,4100) 2495,4105 2630,4105 2635,4100 2635,4050 2625.16,4040.16 M4.57 ; v1(2780,4060) 2782.62,4057.38 2797.62,4057.38 2805,4050 2875,4050 2970,4145 2970,4330 v1(3060,4420) ; v1(3175,4485) 3175,4520 3160,4535 2995,4535 2960,4570 2960,4615 2997.5,4652.5 3022.5,4652.5 J1.4 2955,4655 2930,4680 2930,4785 3020,4875 3105,4875 3145,4835 3145,4700 3205.19,4639.81 swdr.1
  Bottom Layer w6: v1(2490,4100) 2560,4030 2750,4030 v1(2780,4060) ; v1(3060,4420) 3110,4420 v1(3175,4485)
NetJ1_6: J1.6 M4.59 | length 2058
  Top Layer w6: v1(2555,4080) 2585.79,4049.21 M4.59
  Bottom Layer w6: v1@2555.79,4079.21 v1(2555,4080) 2585,4110 2900,4110 2930,4080 2944.21,4080 2945,4079.21 2959.21,4079.21 2980,4100 3070,4100 3380,4410 3380,4530 3335,4575 3255,4575 3135,4695 3135,4830 3105,4860 2995,4860 2935,4800 2935,4730 2960,4705 J1.6
NetL1_2: L1.2 M4.55 | length 791.9
  Top Layer w6: L1.2 2193.98,3953.98 2325,4085 2340,4085 2360,4105 2400,4105 2450,4155 2645,4155 2664.53,4135.47 M4.55
NetM4_17: M4.17 QSPI.5 | length 4066.1
  Top Layer w6: v1(2275,4210) v1(2580,4210) ; v1(2415,3485) 2454.06,3524.06 2484.46,3524.06 2487.36,3526.97 M4.17 ; QSPI.5 v1(3540,4755)